# Altium PCB GPSDO.with.gnd.trace.PcbDoc (part 1 of 2)
Units mm, origin at the board's own origin, x right, y up, seen from the top; angles counter-clockwise.
Board outline 100 x 100 mm, 2 copper layers (Top Layer, Bottom Layer); 71 components, 65 nets, 370 pads, 228 vias.
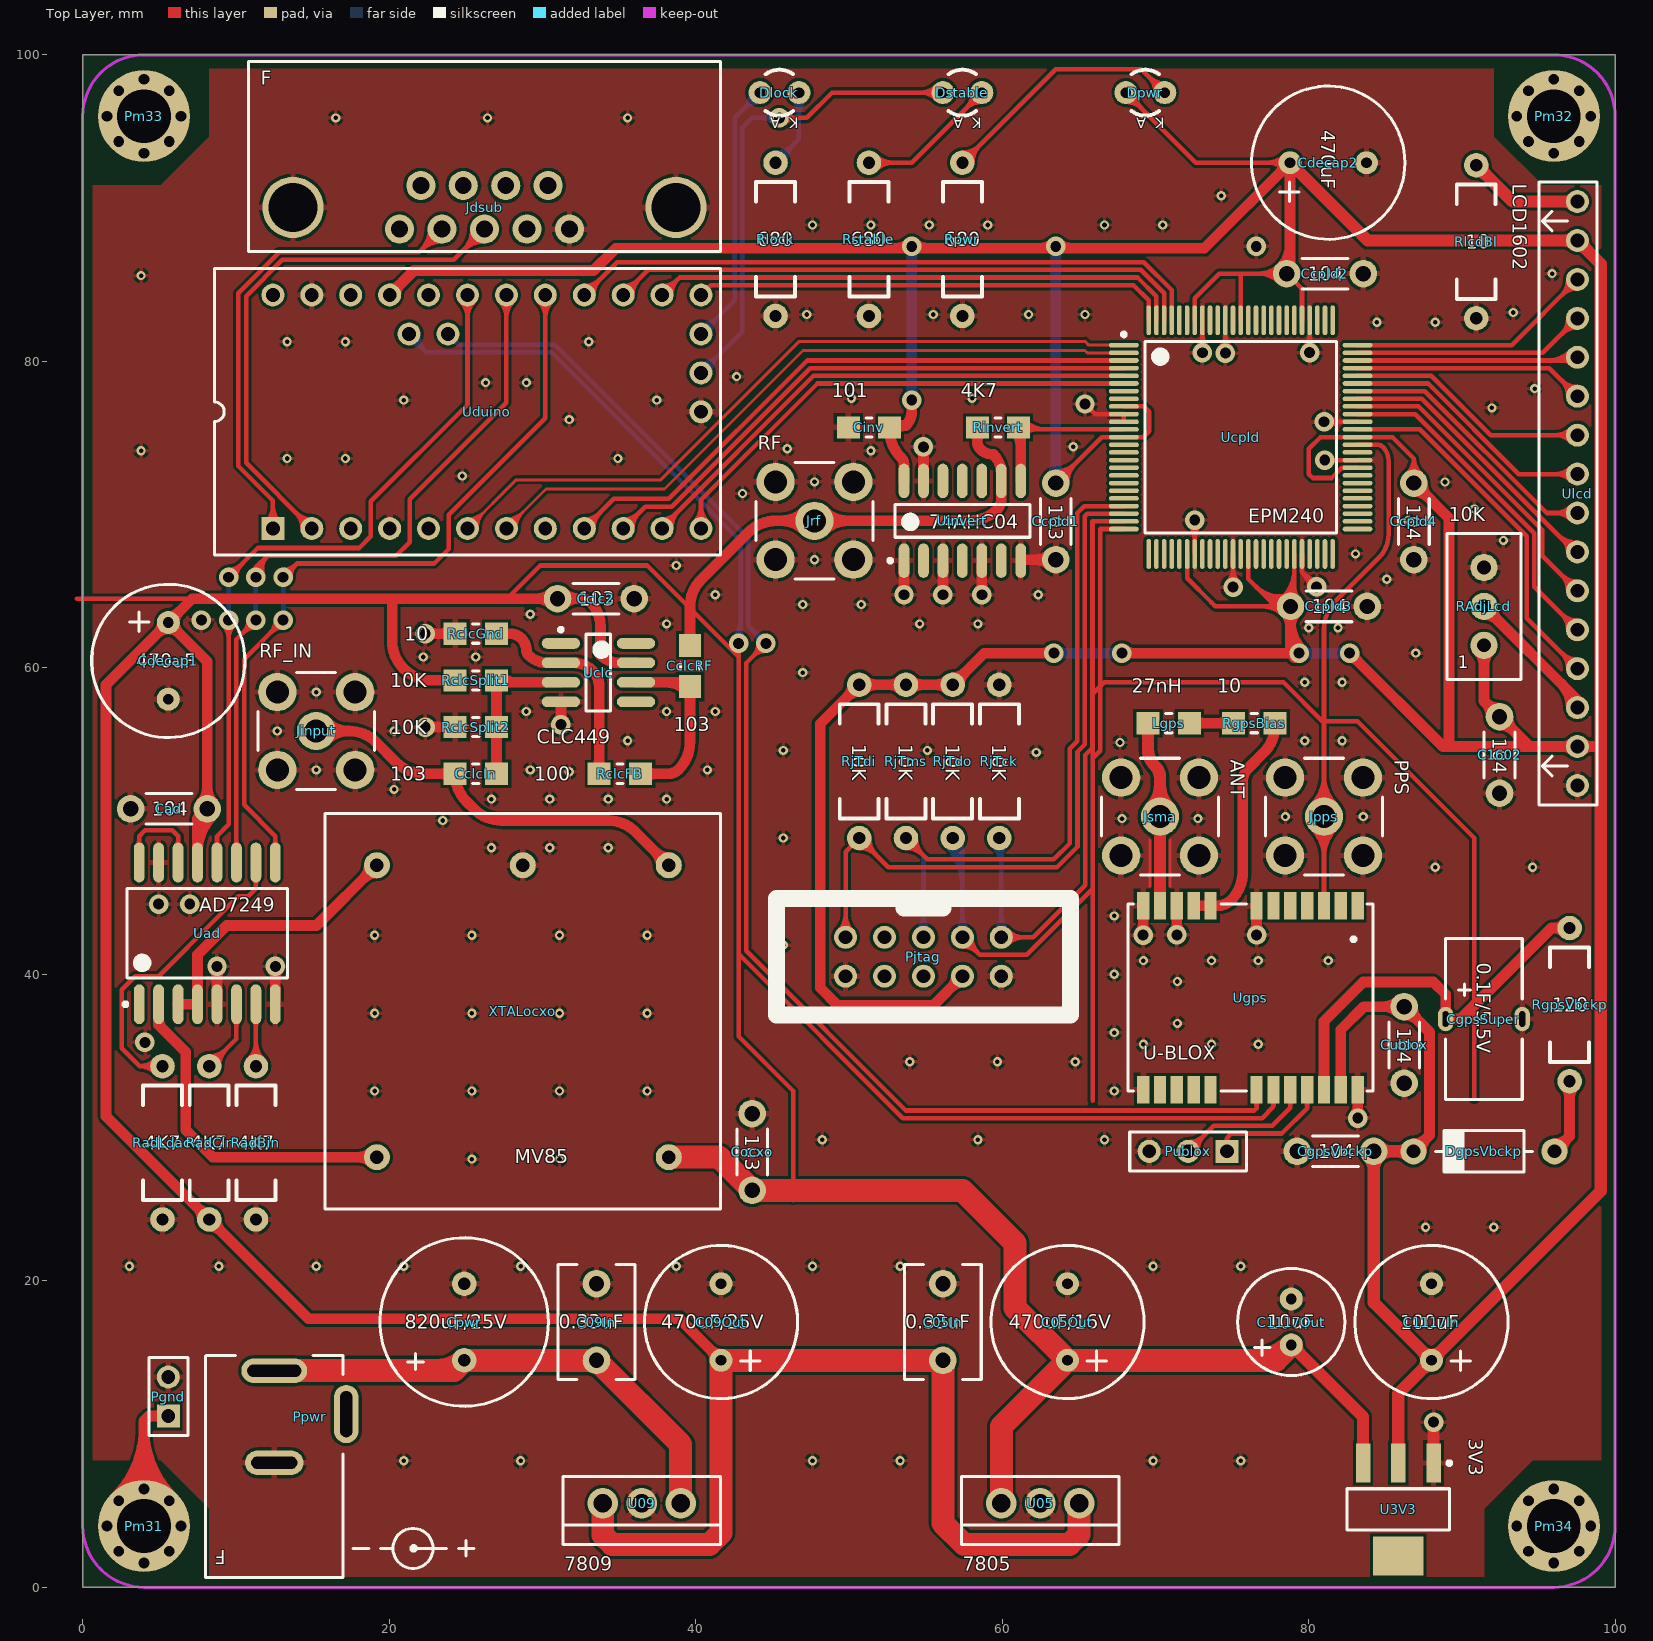
[diagram p0: Top Layer view]
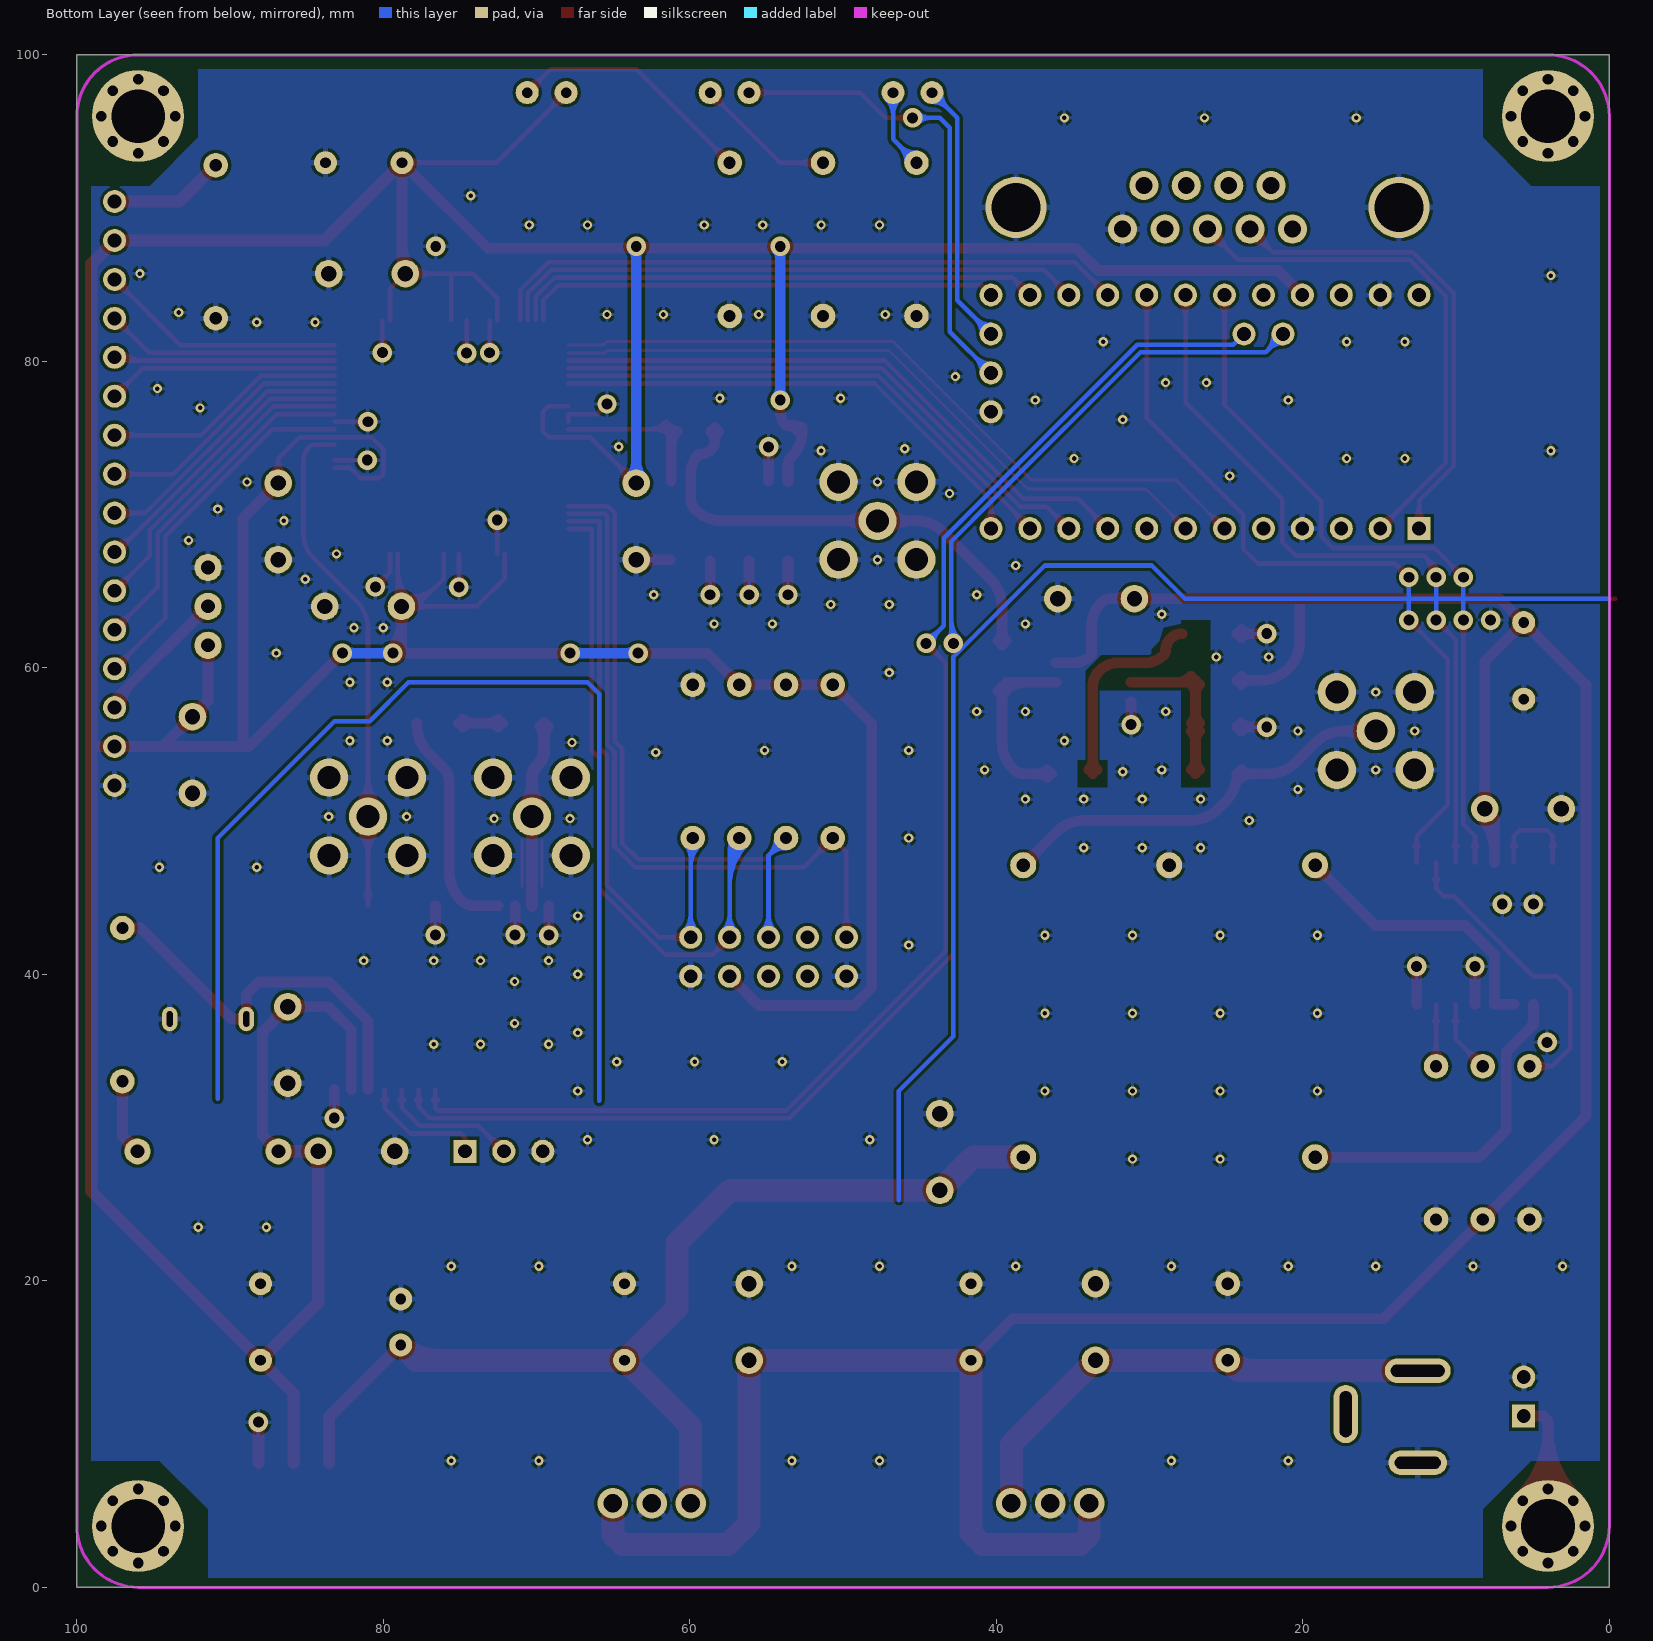
[diagram p1: Bottom Layer view, seen from below]

## Layer stack, top to bottom
Top Layer: signal copper 0.0356
Dielectric: dielectric 0.32, FR-4, Dk 4.8
Bottom Layer: signal copper 0.0356

## Board outline
0,0 100,0 100,100 0,100

## Design rules (kind name [scope] priority, off if disabled: settings)
Clearance [All] p1: gap=0.2
ComponentClearance [All] p1: gap=0.203 collisioncheckmode=3 verticalgap=0.203 showdistances=FALSE
PolygonConnect PolygonConnect_1 [(InComponent('U05') OR InComponent('U09'))] p1: connectstyle=Relief reliefconductorwidth=0.375 reliefentries=4 polygonreliefangle="45 Angle"
PolygonConnect [(InPadClass('All Pads'))] p2: connectstyle=Relief reliefconductorwidth=0.375 reliefentries=4 polygonreliefangle="90 Angle"
RoutingVias [All] p1: holewidth=0.3 width=0.6 viastyle="Through Hole" minholewidth=0.711 minwidth=1.27 maxholewidth=0.711 maxwidth=1.27
SilkscreenOverComponentPads [All] p1: minsilkscreentomaskgap=0.254
SolderMaskExpansion [All] p1: expansion=0.102
Width [All] p1: maxlimit=5 minlimit=0.2 preferedwidth=0.2
26 further rules are at their usual default settings.

## Components (designator, comment, footprint, x,y, rotation, side; value= is the part's Value field where it differs from the comment)
C05In "0.33uF" "ERO MKC1858 0.33uF/63V" 56.134,17.312 r90 top
C05Out "470uF/16V" "SANYO SEP 560uF 10V" 64.262,17.312 r90 top
C09In "0.33uF" "ERO MKC1858 0.33uF/63V" 33.528,17.312 r270 top
C09Out "470uF/25V" "SANYO SEP 560uF 10V" 41.656,17.312 r90 top
C1117In "100uF" "SANYO SEP 560uF 10V" 88.011,17.312 r90 top
C1117Out "10uF" "Nichicon FW 10uF 100V" 78.867,18.812 r270 top
C1602 "104" "BC MKT370 0.1uF/63V" 92.456,51.816 r90 top
Cad "104" "BC MKT370 0.1uF/63V" 8.128,50.8 r180 top
Cclc2 "103" "BC MKT370 0.1uF/63V" 30.988,64.516 r0 top
CclcIn "103" 0805.Cap.L 25.654,53.086 r0 top
CclcRF "103" 0805.Cap.L 39.624,60.12 r90 top
Ccpld1 "103" "BC MKT370 0.1uF/63V" 63.5,67.056 r90 top
Ccpld2 "104" "BC MKT370 0.1uF/63V" 83.566,85.725 r180 top
Ccpld3 "104" "BC MKT370 0.1uF/63V" 83.82,64.008 r180 top
Ccpld4 "104" "BC MKT370 0.1uF/63V" 86.868,67.056 r90 top
Cdecap1 "470uF" "SANYO SEP 560uF 10V" 5.588,60.452 r270 top
Cdecap2 "470uF" "SANYO SEP 560uF 10V" 81.28,92.964 r0 top
CgpsSuper "0.1F/5.5V" "Panasonic SD 0.1F / 5.5V" 91.44,37.084 r0 top
CgpsVbckp "104" "BC MKT370 0.1uF/63V" 79.248,28.448 r0 top
Cinv "101" 0805.Cap.L 51.308,75.692 r0 top
Cocxo "103" "BC MKT370 0.1uF/63V" 43.688,25.908 r90 top
Cpwr "820uF/25V" "NCC LXZ 820uF 25V" 24.892,19.812 r270 top
Cublox "104" "BC MKT370 0.1uF/63V" 86.233,32.893 r90 top
DgpsVbckp "1N4002" 1N4007 91.44,28.448 r0 top
Dlock "LED0" "3mm LED" 44.196,97.536 r180 top
Dpwr "LED0" "3mm LED" 68.072,97.536 r180 top
Dstable "LED0" "3mm LED" 56.134,97.536 r180 top
Jdsub "D-Sub 9" DSUB-9 26.22,99.568 r0 top
Jinput "RF_IN" SMA 15.24,55.88 r0 top
Jpps "PPS" SMA 81.001,50.292 r90 top
Jrf "RF" SMA 47.752,69.596 r0 top
Jsma "ANT" SMA 70.301,50.292 r90 top
Lgps "27nH" 0805.L.L 70.866,56.388 r180 top
Pgnd "Header 2" HDR1X2 5.588,11.176 r90 top
Pjtag "Header 5X2" "DC3 2.54mm 10P" 54.864,41.148 r180 top
Pm31 "M3" "M3 Screw Mount" 4,4 r0 top
Pm32 "M3" "M3 Screw Mount" 96,96 r0 top
Pm33 "M3" "M3 Screw Mount" 4,96 r0 top
Pm34 "M3" "M3 Screw Mount" 96,4 r0 top
Ppwr "DC-005" DC-005 12.5,8.128 r90 top
Publox "Header 3" HDR1X3 74.676,28.448 r180 top
RadBin "4K7" RJ24 11.303,24.003 r90 top
RadClr "4K7" RJ24 8.255,24.003 r90 top
RAdjLcd "10K" 3296W 91.44,64.008 r0 top
RadLdac "4K7" RJ24 5.207,34.003 r270 top
RclcFB "100" 0805.Res.L 35.052,53.086 r0 top
RclcGnd "10" 0805.Res.L 25.654,62.23 r0 top
RclcSplit1 "10K" 0805.Res.L 25.654,59.182 r180 top
RclcSplit2 "10K" 0805.Res.L 25.654,56.134 r0 top
RgpsBias "10" 0805.Res.L 76.454,56.388 r180 top
RgpsVbckp "120" RJ24 97.028,33.02 r90 top
Rinvert "4K7" 0805.Res.L 59.729,75.692 r180 top
RjTck "10K" RJ24 59.817,48.895 r90 top
RjTdi "10K" RJ24 50.673,48.895 r90 top
RjTdo "10K" RJ24 56.769,48.895 r90 top
RjTms "10K" RJ24 53.721,48.895 r90 top
RlcdBl "10" RJ24 90.932,82.804 r90 top
Rlock "680" RJ24 45.212,92.964 r270 top
Rpwr "680" RJ24 57.404,92.964 r270 top
Rstable "680" RJ24 51.308,92.964 r270 top
U3V3 "3V3" "LM1117 SOT-223" 85.852,5.08 r270 top
U05 "7805" MC7805 62.484,4.064 r180 top
U09 "7809" MC7805 36.477,4.064 r180 top
Uad "AD7249" "AD7249 SOIC-16" 8.128,42.672 r90 top
Uclc "CLC449" "CLC449 SOIC-8" 33.655,59.69 r0 top
Ucpld "EPM240" "EPM240/570 TQFP-100" 75.565,75.057 r0 top
Uduino "MiniPro" "DIP24 - Arduino" 12.41,69.088 r90 top
Ugps "U-BLOX" NEO-GPS 84.201,38.481 r90 top
Uinvert "74AHC04" "74AHC04 SOP-14" 57.404,69.596 r90 top
Ulcd "LCD1602" LCD1602 97.536,52.324 r90 top
XTALocxo "MV85" MV85 28.72,37.592 r270 top

## Footprints (in the part's own frame and the unit in brackets; to place one, negate y for a bottom-side part, rotate by r counter-clockwise, add the part's x,y. Pads: shape width x height; smd on the part's side, far side on the other; paste and mask are expansions set on the pad)
1N4007 [mm]
  round 1.7 hole 0.9: 1(-4.6,0) 2(4.6,0)
  silkscreen extent -3.17,-1.36 3.17,1.36
"3mm LED" [mm]
  round 1.5 hole 0.7: 1(0,0) 2(-2.54,0)
  silkscreen extent -2.17,-1.5 -0.37,1.5
"74AHC04 SOP-14" [mm] "SOP, 14-Leads, Body 8.8x4.0mm (max), Pitch 1.27mm, IPC Low Density"
  oval 2.25x0.7 smd: 1(-2.6,3.81) 2(-2.6,2.54) 3(-2.6,1.27) 4(-2.6,0) 5(-2.6,-1.27) 6(-2.6,-2.54) 7(-2.6,-3.81) 8(2.6,-3.81) 9(2.6,-2.54) 10(2.6,-1.27) 11(2.6,0) 12(2.6,1.27) 13(2.6,2.54) 14(2.6,3.81)
  silkscreen extent -2.72,-4.4 1.07,4.83, body extent -2,-4.38 2,4.38, height 1.75
0805.Cap.L [mm]
  rect 1.5x1.45 smd: 1(-1.35,0) 2(1.35,0)
  silkscreen extent -0.2,-0.63 0.2,0.63, body extent -1,-0.6 1,0.6, height 0.5
0805.L.L [mm]
  rect 1.5x1.45 smd: 1(-1.35,0) 2(1.35,0)
  silkscreen extent -0.2,-0.63 0.2,0.63, body extent -1,-0.6 1,0.6, height 0.5
0805.Res.L [mm]
  rect 1.5x1.45 smd: 1(-1.35,0) 2(1.35,0)
  silkscreen extent -0.2,-0.63 0.2,0.63, body extent -1,-0.6 1,0.6, height 0.5
3296W [mil] "3296W Trimming Potentiometer"
  round 70 hole 35: 1(0,-100) 2(0,0) 3(0,100)
  silkscreen extent -95,-188 95,188
"AD7249 SOIC-16" [mm]
  oval 2.6x0.7 smd: 1(-4.625,4.445) 2(-4.625,3.175) 3(-4.625,1.905) 4(-4.625,0.635) 5(-4.625,-0.635) 6(-4.625,-1.905) 7(-4.625,-3.175) 8(-4.625,-4.445) 9(4.625,-4.445) 10(4.625,-3.175) 11(4.625,-1.905) 12(4.625,-0.635) 13(4.625,0.635) 14(4.625,1.905) 15(4.625,3.175) 16(4.625,4.445)
  silkscreen extent -4.75,-5.25 2.93,5.47, body extent -3.8,-5.25 3.8,5.25, height 2.65
"BC MKT370 0.1uF/63V" [mm] "7mm x 2mm, foot dist. 5mm"
  round 1.8 hole 1: 1(0,0) 2(5,0)
  silkscreen extent 1,-1 4,1
"CLC449 SOIC-8" [mm] "SOIC, 8-Leads, Body 5.0x4.0mm (max), Pitch 1.27mm, IPC Low Density"
  oval 2.5x0.7 smd: 1(-2.45,1.905) 2(-2.45,0.635) 3(-2.45,-0.635) 4(-2.45,-1.905) 5(2.45,-1.905) 6(2.45,-0.635) 7(2.45,0.635) 8(2.45,1.905)
  silkscreen extent -2.57,-2.5 0.8,2.93, body extent -1.99,-2.5 1.99,2.5, height 1.75
"DC3 2.54mm 10P" [mm]
  round 1.5 hole 0.9 mask+0: 1(-5.08,-1.27) 2(-5.08,1.27) 3(-2.54,-1.27) 4(-2.54,1.27) 5(0,-1.27) 6(0,1.27) 7(2.54,-1.27) 8(2.54,1.27) 9(5.08,-1.27) 10(5.08,1.27)
  silkscreen extent -9.6,-3.8 9.6,3.8
DC-005 [mm]
  rrect100% 1.6x4.3 hole 0.8 slot 3.5 at 90 deg mask+0: 1(6,0)
  rrect100% 1.6x3.8 hole 0.8 slot 3 at 90 deg mask+0: 2(0,0)
  rrect100% 3.8x1.6 hole 0.8 slot 3 at 0 deg mask+0: 3(3.175,-4.699)
  silkscreen extent -7.5,-4.5 6.98,4.5
"DIP24 - Arduino" [mm]
  rect 1.5x1.5 hole 0.9: 1(0,0)
  round 1.5 hole 0.9: 2(0,-2.54) 3(0,-5.08) 4(0,-7.62) 5(0,-10.16) 6(0,-12.7) 7(0,-15.24) 8(0,-17.78) 9(0,-20.32) 10(0,-22.86) 11(0,-25.4) 12(0,-27.94) 13(15.24,-27.94) 14(15.24,-25.4) 15(15.24,-22.86) 16(15.24,-20.32) 17(15.24,-17.78) 18(15.24,-15.24) 19(15.24,-12.7) 20(15.24,-10.16) 21(15.24,-7.62) 22(15.24,-5.08) 23(15.24,-2.54) 24(15.24,0) 25(7.62,-27.94) 26(10.16,-27.94) 27(12.7,-27.94) 28(12.7,-11.43) 29(12.7,-8.89)
  silkscreen extent -1.74,-29.21 16.98,3.81
DSUB-9 [mm]
  round 1.9 hole 1.1 mask+0: 1(-5.54,-10.94) 2(-2.77,-10.94) 3(0,-10.94) 4(2.77,-10.94) 5(5.54,-10.94) 6(-4.155,-8.1) 7(-1.385,-8.1) 8(1.385,-8.1) 9(4.155,-8.1)
  round 4 hole 3.2 mask+0: 10(-12.5,-9.52) 11(12.5,-9.52)
  silkscreen extent -15.4,-12.4 15.4,0
"EPM240/570 TQFP-100" [mm] "TSQFP, 100-Leads, Body 16.0x16.0mm (max), Pitch 0.50mm, IPC Low Density"
  oval 1.95x0.3 smd: 1(-7.625,6) 2(-7.625,5.5) 3(-7.625,5) 4(-7.625,4.5) 5(-7.625,4) 6(-7.625,3.5) 7(-7.625,3) 8(-7.625,2.5) 9(-7.625,2) 10(-7.625,1.5) 11(-7.625,1) 12(-7.625,0.5) 13(-7.625,0) 14(-7.625,-0.5) 15(-7.625,-1) 16(-7.625,-1.5) 17(-7.625,-2) 18(-7.625,-2.5) 19(-7.625,-3) 20(-7.625,-3.5) 21(-7.625,-4) 22(-7.625,-4.5) 23(-7.625,-5) 24(-7.625,-5.5) 25(-7.625,-6) 51(7.625,-6) 52(7.625,-5.5) 53(7.625,-5) 54(7.625,-4.5) 55(7.625,-4) 56(7.625,-3.5) 57(7.625,-3) 58(7.625,-2.5) 59(7.625,-2) 60(7.625,-1.5) 61(7.625,-1) 62(7.625,-0.5) 63(7.625,0) 64(7.625,0.5) 65(7.625,1) 66(7.625,1.5) 67(7.625,2) 68(7.625,2.5) 69(7.625,3) 70(7.625,3.5) 71(7.625,4) 72(7.625,4.5) 73(7.625,5) 74(7.625,5.5) 75(7.625,6)
  oval 0.3x1.95 smd: 26(-6,-7.625) 27(-5.5,-7.625) 28(-5,-7.625) 29(-4.5,-7.625) 30(-4,-7.625) 31(-3.5,-7.625) 32(-3,-7.625) 33(-2.5,-7.625) 34(-2,-7.625) 35(-1.5,-7.625) 36(-1,-7.625) 37(-0.5,-7.625) 38(0,-7.625) 39(0.5,-7.625) 40(1,-7.625) 41(1.5,-7.625) 42(2,-7.625) 43(2.5,-7.625) 44(3,-7.625) 45(3.5,-7.625) 46(4,-7.625) 47(4.5,-7.625) 48(5,-7.625) 49(5.5,-7.625) 50(6,-7.625) 76(6,7.625) 77(5.5,7.625) 78(5,7.625) 79(4.5,7.625) 80(4,7.625) 81(3.5,7.625) 82(3,7.625) 83(2.5,7.625) 84(2,7.625) 85(1.5,7.625) 86(1,7.625) 87(0.5,7.625) 88(0,7.625) 89(-0.5,7.625) 90(-1,7.625) 91(-1.5,7.625) 92(-2,7.625) 93(-2.5,7.625) 94(-3,7.625) 95(-3.5,7.625) 96(-4,7.625) 97(-4.5,7.625) 98(-5,7.625) 99(-5.5,7.625) 100(-6,7.625)
  silkscreen extent -7.75,-6.25 6.25,6.82, body extent -7,-7 7,7, height 1.2
"ERO MKC1858 0.33uF/63V" [mm] "7.5mm x 5mm, foot dist. 5mm"
  round 1.8 hole 1: 1(-2.5,0) 2(2.5,0)
  silkscreen extent -3.75,-2.5 3.75,2.5
HDR1X2 [mm] "Connector; Header; 2 Position"
  rect 1.5x1.5 hole 0.9: 1(0,0)
  round 1.5 hole 0.9: 2(2.54,0)
  silkscreen extent -1.27,-1.27 3.81,1.27
HDR1X3 [mm] "Connector; Header; 3 Position"
  rect 1.5x1.5 hole 0.9: 1(0,0)
  round 1.5 hole 0.9: 2(2.54,0) 3(5.08,0)
  silkscreen extent -1.27,-1.27 6.35,1.27
LCD1602 [mm] "SIP"
  round 1.5 hole 0.9 mask+0: 1(0,0) 2(2.54,0) 3(5.08,0) 4(7.62,0) 5(10.16,0) 6(12.7,0) 7(15.24,0) 8(17.78,0) 9(20.32,0) 10(22.86,0) 11(25.4,0) 12(27.94,0) 13(30.48,0) 14(33.02,0) 15(35.56,0) 16(38.1,0)
  silkscreen extent -1.27,-1.27 39.37,2.5
"LM1117 SOT-223" [mm] "SOT223, 4-Leads, Body 6.7x7.3mm (max), Pitch 2.30mm, IPC Low Density"
  rect 2.55x0.95 smd: 1(-3.025,2.3) 2(-3.025,0) 3(-3.025,-2.3)
  rect 2.55x3.3 smd: 4(3.025,0)
  silkscreen extent -3.15,-3.35 1.35,3.45, body extent -1.85,-3.35 1.85,3.35, height 1.8
"M3 Screw Mount" [mm] "M3 Screw Mount, Hole D. 3.5mm"
  round 6 hole 3.5: 1(0,0)
MC7805 [mm] "TO?220, SINGLE GAUGE"
  round 2 hole 1.2: 1(-2.54,-1.416) 2(0,-1.416) 3(2.54,-1.416)
  silkscreen extent -5.14,-3.18 5.14,1.27
MV85 [mm]
  round 1.7 hole 0.9: 1(-9.525,9.525) 2(-9.525,0) 3(-9.525,-9.525) 4(9.525,9.525) 5(9.525,-9.525)
  silkscreen extent -12.9,-12.9 12.9,12.9
"NCC LXZ 820uF 25V" [mm] "10*24, foot dist. 5mm"
  round 1.6 hole 0.8: 1(5,0) 2(0,0)
  silkscreen extent -3,-5.5 8,5.5
NEO-GPS [mm]
  rect 1.8x0.8 smd mask+0: 1(6,1) 2(6,2.1) 3(6,3.2) 4(6,4.3) 5(6,5.4) 6(6,6.5) 7(6,7.6) 8(6,10.6) 9(6,11.7) 10(6,12.8) 11(6,13.9) 12(6,15) 13(-6,15) 14(-6,13.9) 15(-6,12.8) 16(-6,11.7) 17(-6,10.6) 18(-6,7.6) 19(-6,6.5) 20(-6,5.4) 21(-6,4.3) 22(-6,3.2) 23(-6,2.1) 24(-6,1)
  silkscreen extent -6.1,0 6.1,16
"Nichicon FW 10uF 100V" [mm] "6.5mm*12mm, foot dist. 3mm"
  round 1.5 hole 0.7: 1(3,0) 2(0,0)
  silkscreen extent -2,-3.5 5,3.5
"Panasonic SD 0.1F / 5.5V" [mm]
  rrect100% 1x1.6 hole 0.4 slot 1 at 90 deg mask+0: 1(-2.5,0) 2(2.5,0)
  silkscreen extent -2.5,-5.25 2.5,5.25
RJ24 [mm] "Beijing 718 RJ24, 1/4W"
  round 1.6 hole 0.8: 1(0,0) 2(10,0)
  silkscreen extent 1.27,-1.27 8.73,1.27
"SANYO SEP 560uF 10V" [mm] "D: 10mm, Lmax: 13mm, Fdist: 5mm, Fd: 0.6mm"
  round 1.5 hole 0.7: 1(-2.5,0) 2(2.5,0)
  silkscreen extent -5,-5 5,5
SMA [mm]
  round 2.5 hole 1.5: 1(-2.54,2.54) 2(-2.54,-2.54) 3(2.54,-2.54) 4(2.54,2.54) 5(0,0)
  silkscreen extent -3.81,-3.81 3.81,3.81

## Part data
C05In C09In C1602 Cad Cclc2 CclcIn CclcRF Ccpld1 Ccpld2 Ccpld3 Ccpld4 CgpsVbckp Cinv Cocxo Cublox: library part Cap, "Capacitor"
C05Out C09Out C1117In C1117Out Cdecap1 Cdecap2 CgpsSuper Cpwr: library part "Cap Pol1", "Polarized Capacitor (Radial)"
DgpsVbckp: library part "Diode 1N4001", "1 Amp General Purpose Rectifier"
Dlock Dpwr Dstable: "Typical INFRARED GaAs LED"
Jinput Jpps Jrf Jsma: library part SMA
Lgps: library part Inductor, "Inductor"
Pgnd: "Header, 2-Pin"
Pjtag: "Header, 5-Pin, Dual row"
Pm31 Pm32 Pm33 Pm34: library part "M3 Screw Mount", "M3 screw mount, hole d: 3.5mm"
Publox: "Header, 3-Pin"
RadBin RadClr RadLdac RclcFB RclcGnd RclcSplit1 RclcSplit2 RgpsBias RgpsVbckp Rinvert RjTck RjTdi RjTdo RjTms RlcdBl Rlock Rpwr Rstable: library part Res1, "Resistor"
RAdjLcd: library part "Trimming Potentiometer", "3296 - 3/8\" Square Trimming Potentiometer"
U3V3: library part LM1117, "LM1117-N/LM1117I 800mA Low-Dropout Linear Regulator"
U05 U09: library part MC7805, "1.0 A Positive Voltage  Regulators"
Uad: "LC2MOS Dual 12-Bit Serial DACPORT"
Uclc: "1.1GHz Ultra Wideband Monolithic Op Amp"
Ucpld: "Altera Max II CPLD"
Uduino: library part ArduinoMiniPro, "Microcontroller board based on the ATmega328P"
Ugps: library part NEO-GPS, "u-blox 6 GPS Modules"
Uinvert: "hex inverter"
XTALocxo: library part OCXO, "OCXO"

## Via types
v1: diameter 0.6, hole 0.3, Top Layer to Bottom Layer, 152 vias
v2: diameter 1.27, hole 0.711, Top Layer to Bottom Layer, 44 vias
v3: diameter 1, hole 0.7, Top Layer to Bottom Layer, 32 vias

## Nets (pads, with @x,y where several pads share a name; then routed paths per layer and width w, separated by ;. In a path a pad name is that pad's centre, name@x,y a point inside that pad or via, vN(x,y) a via of type N, cw(c..) or ccw(c..) an arc to the next point about the centre after c; other vN are vias at no path point)
AMPRF: CclcRF.2 Jrf.5 Rinvert.2 Uinvert.9 | length 41.4
  Top Layer w0.7: CclcRF.2@39.359,61.76 ccw(c38.719,62.4) 39.624,62.4 ccw(c40.529,62.4) CclcRF.2@39.889,61.76 ; CclcRF.2@39.624,61.47 39.624,63.972 cw(c42.164,63.972) 40.368,65.768 43.452,68.852 cw(c45.248,67.056) 45.248,69.596 Jrf.5@47.752,69.596 57.876,69.596 ccw(c57.876,72.136) 59.672,70.34 ccw(c59.015,70.997) 59.944,70.997 Uinvert.9@59.944,72.196 59.944,72.688 ccw(c58.21,72.688) 59.436,73.914 cw(c59.436,75.14) 58.569,74.273 cw(c59.027,74.731) 58.379,74.731 Rinvert.2@58.379,75.692 ; Jrf.5@47.116,68.96 ccw(c45.579,67.423) 45.579,69.596 ccw(c45.579,71.769) Jrf.5@47.116,70.232 ; Jrf.5@48.388,68.96 cw(c49.925,67.423) 49.925,69.596 cw(c49.925,71.769) Jrf.5@48.388,70.232 ; Rinvert.2@58.114,75.427 cw(c57.474,74.787) 58.379,74.787 cw(c59.284,74.787) Rinvert.2@58.644,75.427
CLK: Rinvert.1 Ucpld.12 Uinvert.8 | length 14.2
  Top Layer w0.3: Rinvert.1@61.214,75.557 Ucpld.12@67.94,75.557 ; Rinvert.1@61.298,75.886 ccw(c62.094,76.682) 62.094,75.557 ; Rinvert.1@61.511,75.285 cw(c62.166,74.63) 62.166,75.557 ; Rinvert.1@61.511,76.099 ccw(c62.818,77.406) 62.818,75.557
  Top Layer w0.7: Rinvert.1@60.839,75.427 cw(c59.933,74.521) 61.214,74.521 ; Uinvert.8@61.214,72.196 Rinvert.1@61.214,75.557
D0: Ucpld.68 Ulcd.7 | length 21.6
  Top Layer w0.3: Ucpld.68@83.19,77.557 87.378,77.557 97.371,67.564 Ulcd.7@97.536,67.564 ; 96.231,68.705 ccw(c97.536,70.01) Ulcd.7@97.536,68.164 ; 96.628,68.307 cw(c95.885,67.564) Ulcd.7@96.936,67.564 ; 96.743,68.193 ccw(c97.536,68.986) Ulcd.7@97.536,67.864
D1: Ucpld.69 Ulcd.8 | length 19.9
  Top Layer w0.3: Ucpld.69@83.19,78.057 87.585,78.057 95.538,70.104 Ulcd.8@97.536,70.104 ; Ulcd.8@97.112,69.68 ccw(c96.087,68.655) 96.087,70.104 ccw(c96.087,71.553) Ulcd.8@97.112,70.528
D2: Ucpld.70 Ulcd.9 | length 19.1
  Top Layer w0.3: Ucpld.70@83.19,78.557 87.793,78.557 93.706,72.644 Ulcd.9@97.536,72.644 ; Ulcd.9@97.112,72.22 ccw(c96.087,71.195) 96.087,72.644 ccw(c96.087,74.093) Ulcd.9@97.112,73.068
D3: Ucpld.71 Ulcd.10 | length 18.2
  Top Layer w0.3: Ucpld.71@83.19,79.057 88,79.057 91.873,75.184 Ulcd.10@97.536,75.184 ; Ulcd.10@97.112,74.76 ccw(c96.087,73.735) 96.087,75.184 ccw(c96.087,76.633) Ulcd.10@97.112,75.608
D4: Ucpld.72 Ulcd.11 | length 17.4
  Top Layer w0.3: Ucpld.72@83.19,79.557 95.703,79.557 Ulcd.11@97.536,77.724 ; Ulcd.11@96.936,77.724 ccw(c95.487,77.724) 96.512,78.748 ccw(c97.536,79.773) Ulcd.11@97.536,78.324
D5: Ucpld.73 Ulcd.12 | length 17.8
  Top Layer w0.3: Ucpld.73@83.19,80.057 97.329,80.057 Ulcd.12@97.536,80.264 ; 95.588,80.057 ccw(c95.588,82.212) Ulcd.12@97.112,80.688 ; 96.312,80.057 ccw(c96.312,81.488) Ulcd.12@97.324,80.476 ; 96.587,80.057 cw(c96.587,79.315) Ulcd.12@97.112,79.84
D6: Ucpld.74 Ulcd.13 | length 17.6
  Top Layer w0.3: Ucpld.74@83.19,80.557 95.289,80.557 Ulcd.13@97.536,82.804 ; Ulcd.13@96.936,82.804 cw(c95.487,82.804) 96.512,81.78 cw(c97.536,80.755) Ulcd.13@97.536,82.204
D7: Ucpld.75 Ulcd.14 | length 18.4
  Top Layer w0.3: Ucpld.75@83.19,81.057 93.249,81.057 Ulcd.14@97.536,85.344 ; Ulcd.14@96.936,85.344 cw(c95.487,85.344) 96.512,84.32 cw(c97.536,83.295) Ulcd.14@97.536,84.744
E: Ucpld.67 Ulcd.6 | length 22.6
  Top Layer w0.3: Ucpld.67@83.19,77.057 87.171,77.057 95.234,68.994 95.234,67.326 Ulcd.6@97.536,65.024 ; Ulcd.6@96.936,65.024 ccw(c95.487,65.024) 96.512,66.048 ccw(c97.536,67.073) Ulcd.6@97.536,65.624
GND: C05In.2 C05Out.2 C09In.1 C09Out.2 C1117In.2 C1117Out.2 C1602.1 Cad.2 Cclc2.2 Ccpld1.1 Ccpld2.1 Ccpld3.1 Ccpld4.1 Cdecap1.2 Cdecap2.2 CgpsSuper.2 CgpsVbckp.1 Cinv.1 Cocxo.2 Cpwr.2 Cublox.1 Jdsub.5 Jdsub.10 Jdsub.11 Jinput.1 Jinput.2 Jinput.3 Jinput.4 Jpps.1 Jpps.2 Jpps.3 Jpps.4 Jrf.1 Jrf.2 Jrf.3 Jrf.4 Jsma.1 Jsma.2 Jsma.3 Jsma.4 Pgnd.2 Pjtag.2 Pjtag.10 Ppwr.2 Publox.3 RadBin.1 RAdjLcd.3 RadLdac.2 RclcGnd.1 RclcSplit2.1 RjTck.2 RlcdBl.1 Rlock.2 Rpwr.2 Rstable.2 U3V3.1 U05.2 U09.2 Uad.5 Uad.8 Uad.15 Uclc.4 Ucpld.10 Ucpld.11 Ucpld.32 Ucpld.37 Ucpld.46 Ucpld.60 Ucpld.65 Ucpld.79 Ucpld.90 Ucpld.93 Uduino.4 Uduino.23 Uduino.25 Ugps.7 Ugps.10 Ugps.12 Ugps.13 Ugps.24 Uinvert.1 Uinvert.3 Uinvert.5 Uinvert.7 Uinvert.13 Ulcd.1 XTALocxo.2 | length 90.6
  Top Layer w0.2: 69.643,45.72 69.643,48.768 ; 70.959,45.72 70.959,48.768
  Top Layer w0.3: v2(65.405,77.216) 66.064,76.557 Ucpld.10@67.94,76.557 Ucpld.11@67.94,76.057 ; v2@72.222,69.301 cw(c71.394,68.473) 72.565,68.473 cw(c73.736,68.473) v2@72.908,69.301 ; Ucpld.32@72.565,67.432 v2(72.565,69.644) ; v2@72.722,80.901 ccw(c71.894,81.729) 73.065,81.729 ccw(c74.236,81.729) v2@73.408,80.901 ; v2(73.065,80.558) Ucpld.93@73.065,82.682 ; v2@74.222,80.877 ccw(c73.394,81.705) 74.565,81.705 ccw(c75.736,81.705) v2@74.908,80.877 ; v2(74.565,80.534) Ucpld.90@74.565,82.682 ; v2@74.722,65.613 ccw(c73.894,66.441) 75.065,66.441 ccw(c76.236,66.441) v2@75.408,65.613 ; v2(75.065,65.27) Ucpld.37@75.065,67.432 ; Ucpld.46@79.565,67.432 79.565,66.231 v2(80.518,65.278) ; v2@79.722,80.916 ccw(c78.894,81.744) 80.065,81.744 ccw(c81.236,81.744) v2@80.408,80.916 ; v2@80.033,65.278 ccw(c78.862,65.278) 79.69,66.106 ccw(c80.518,66.934) v2@80.518,65.763 ; v2(80.065,80.573) Ucpld.79@80.065,82.682 ; v2(81.01,76.057) Ucpld.65@83.19,76.057 ; v2(81.05,73.557) Ucpld.60@83.19,73.557 ; v2@81.353,75.714 cw(c82.181,74.886) 82.181,76.057 cw(c82.181,77.228) v2@81.353,76.4
  Top Layer w0.7: v2@8.561,40.311 cw(c8.075,39.825) 8.763,39.825 cw(c9.451,39.825) v2@8.965,40.311 ; Uad.5@8.763,38.047 v2(8.763,40.513) ; v2@12.371,40.311 cw(c11.885,39.825) 12.573,39.825 cw(c13.261,39.825) v2@12.775,40.311 ; Uad.8@12.573,38.047 v2(12.573,40.513) ; v2(22.352,56.134) RclcSplit2.1@24.304,56.134 ; v2(22.352,62.23) RclcGnd.1@24.304,62.23 ; v2@22.554,55.932 cw(c23.04,55.446) 23.04,56.134 cw(c23.04,56.822) v2@22.554,56.336 ; v2@22.554,62.028 cw(c23.04,61.542) 23.04,62.23 cw(c23.04,62.918) v2@22.554,62.432 ; RclcSplit2.1@24.014,55.869 ccw(c23.374,55.229) 23.374,56.134 ccw(c23.374,57.039) RclcSplit2.1@24.014,56.399 ; RclcGnd.1@24.014,61.965 ccw(c23.374,61.325) 23.374,62.23 ccw(c23.374,63.135) RclcGnd.1@24.014,62.495 ; v2@31.003,56.5 ccw(c30.517,56.986) 31.205,56.986 ccw(c31.893,56.986) v2@31.407,56.5 ; v2(31.205,56.298) Uclc.4@31.205,57.785 ; v2@53.392,64.972 ccw(c52.906,65.458) 53.594,65.458 ccw(c54.282,65.458) v2@53.796,64.972 ; v2(53.594,64.77) Uinvert.1@53.594,66.996 ; v2@54.662,74.22 cw(c54.176,73.734) 54.864,73.734 cw(c55.552,73.734) v2@55.066,74.22 ; Uinvert.13@54.864,72.196 v2(54.864,74.422) ; v2@55.932,64.972 ccw(c55.446,65.458) 56.134,65.458 ccw(c56.822,65.458) v2@56.336,64.972 ; v2(56.134,64.77) Uinvert.3@56.134,66.996 ; v2@58.472,64.972 ccw(c57.986,65.458) 58.674,65.458 ccw(c59.362,65.458) v2@58.876,64.972 ; v2(58.674,64.77) Uinvert.5@58.674,66.996 ; Uinvert.7@61.274,67.056 Ccpld1.1@63.5,67.056 ; Ccpld1.1@63.111,66.667 ccw(c62.172,65.728) 62.172,67.056 ccw(c62.172,68.384) Ccpld1.1@63.111,67.445 ; v2@68.999,42.761 ccw(c68.513,43.247) 69.201,43.247 ccw(c69.889,43.247) v2@69.403,42.761 ; v2(69.201,42.559) Ugps.12@69.201,44.481 ; v2@71.199,42.774 ccw(c70.713,43.26) 71.401,43.26 ccw(c72.089,43.26) v2@71.603,42.774 ; v2(71.401,42.572) Ugps.10@71.401,44.481 ; v2@76.399,42.767 ccw(c75.913,43.253) 76.601,43.253 ccw(c77.289,43.253) v2@76.803,42.767 ; v2(76.601,42.565) Ugps.7@76.601,44.481 ; v2@82.999,30.825 ccw(c82.513,31.311) 83.201,31.311 ccw(c83.889,31.311) v2@83.403,30.825 ; v2(83.201,30.623) Ugps.24@83.201,32.481
  Top Layer w0.8: U3V3.1@88.152,8.105 v2(88.152,10.781)
  other v1: 20.955,8.255 28.575,8.255 47.625,8.255 53.34,8.255 69.85,8.255 75.565,8.255 3.048,20.955 8.89,20.955 15.24,20.955 20.955,20.955 28.575,20.955 38.735,20.955 47.625,20.955 53.34,20.955 69.85,20.955 75.565,20.955 87.63,23.495 92.075,23.495 25.4,27.94 31.115,27.94 48.26,29.21 58.42,29.21 66.675,29.21 19.05,32.385 25.4,32.385 31.115,32.385 36.83,32.385 67.31,32.385 53.975,34.29 59.69,34.29 64.77,34.29 69.215,35.433 73.66,35.433 76.708,35.433 67.31,36.195 71.438,36.798 19.05,37.465 25.4,37.465 31.115,37.465 36.83,37.465 71.438,39.529 67.31,40.005 69.215,40.894 73.66,40.894 76.708,40.894 81.28,40.894 45.72,41.91 19.05,42.545 25.4,42.545 31.115,42.545 36.83,42.545 67.31,43.815 88.265,46.99 94.615,46.99 26.67,48.26 30.48,48.26 34.29,48.26 45.72,48.895 23.495,50.038 67.818,50.165 72.771,50.165 78.486,50.292 83.566,50.292 26.67,51.435 30.48,51.435 34.29,51.435 38.1,51.435 20.32,52.07 31.75,53.213 15.24,53.34 29.21,53.34 40.767,53.34 62.23,54.483 45.72,54.61 55.118,54.61 67.691,55.129 35.56,55.245 79.745,55.245 82.18,55.245 12.7,55.88 20.32,55.88 28.945,57.15 38.1,57.15 41.275,57.15 15.24,58.42 79.745,59.055 82.18,59.055 46.99,59.69 22.225,60.706 25.654,60.706 86.995,60.96 80.01,62.611 81.915,62.611 38.1,62.865 54.61,62.865 58.42,62.865 29.21,63.5 46.99,64.135 50.8,64.135 41.275,64.77 62.357,64.77 85.09,65.775 38.735,66.675 47.752,67.056 83.058,67.437 92.71,68.315 86.487,69.596 90.805,70.358 43.053,71.374 47.752,72.136 88.9,72.125 24.765,72.517 13.335,73.66 17.145,73.66 34.925,73.66 3.81,74.168 51.435,74.168 45.974,74.295 64.643,74.422 31.75,76.2 91.959,76.962 20.955,77.47 37.465,77.47 50.165,77.597 58.039,77.597 94.742,78.221 26.289,78.613 28.956,78.613 42.672,79.005 13.335,81.28 17.145,81.28 33.02,81.28 84.455,82.55 88.265,82.55 47.244,83.058 55.499,83.058 61.722,83.058 65.405,83.058 93.345,83.185 3.81,85.598 3.81,85.598 95.885,85.725 47.625,88.9 51.435,88.9 55.245,88.9 59.055,88.9 66.675,88.9 70.485,88.9 74.295,90.805 16.51,95.885 26.416,95.885 35.56,95.885
  other v2: 4.064,35.56 4.953,44.577 6.985,44.577 7.747,63.119 76.581,87.503
LOCK: Dlock.1 Uduino.27 | length 21.9
  Bottom Layer w0.3: Uduino.27@40.35,81.788 42.545,83.983 42.545,95.885 Dlock.1@44.196,97.536 ; Uduino.27@40.35,82.388 ccw(c40.35,83.837) 41.374,82.812 ccw(c42.399,81.788) Uduino.27@40.95,81.788 ; Dlock.1@43.596,97.536 cw(c42.147,97.536) 43.172,96.512 cw(c44.196,95.487) Dlock.1@44.196,96.936
NetC09In_2: C09In.2 Cpwr.1 Ppwr.1 U09.1 | length 34.8
  Top Layer w1.5: Ppwr.1@12.5,14.128 12.525,14.153 24.233,14.153 Cpwr.1@24.892,14.812 C09In.2@33.528,14.812 39.017,9.323 U09.1@39.017,5.48 ; 23.18,14.153 ccw(c23.18,16.524) Cpwr.1@24.857,14.847
NetCclcIn_2: CclcIn.2 RclcSplit1.1 RclcSplit2.2 Uclc.3 | length 16.9
  Top Layer w0.7: CclcIn.2@26.739,53.351 ccw(c26.099,53.991) 27.004,53.991 ccw(c27.909,53.991) CclcIn.2@27.269,53.351 ; RclcSplit2.2@26.739,55.869 cw(c26.099,55.229) 27.004,55.229 cw(c27.909,55.229) RclcSplit2.2@27.269,55.869 ; RclcSplit2.2@26.739,56.399 ccw(c26.099,57.039) 27.004,57.039 ccw(c27.909,57.039) RclcSplit2.2@27.269,56.399 ; RclcSplit1.1@26.739,58.917 cw(c26.099,58.277) 27.004,58.277 cw(c27.909,58.277) RclcSplit1.1@27.269,58.917 ; CclcIn.2@27.004,53.086 RclcSplit1.1@27.004,59.182 ; RclcSplit1.1@27.131,59.055 Uclc.3@31.205,59.055 ; RclcSplit1.1@27.294,59.447 ccw(c28.241,60.394) 28.241,59.055
NetCclcRF_1: CclcRF.1 RclcFB.2 Uclc.6 | length 15.6
  Top Layer w0.7: Uclc.6@36.105,59.055 CclcRF.1@39.339,59.055 ; RclcFB.2@36.402,53.086 38.223,53.086 ccw(c38.223,54.015) 38.88,53.358 ccw(c37.084,55.154) 39.624,55.154 CclcRF.1@39.624,58.77 ; RclcFB.2@36.692,52.821 cw(c37.332,52.181) 37.332,53.086 cw(c37.332,53.991) RclcFB.2@36.692,53.351 ; 38.091,59.055 cw(c38.091,57.262) CclcRF.1@39.359,58.53 ; CclcRF.1@39.359,58.48 cw(c38.719,57.84) 39.624,57.84 cw(c40.529,57.84) CclcRF.1@39.889,58.48
NetCgpsSuper_1: CgpsSuper.1 RgpsVbckp.2 Ugps.22 | length 27.6
  Top Layer w0.7: Ugps.22@81.001,32.481 81.001,36.932 83.566,39.497 88.138,39.497 88.94,38.695 CgpsSuper.1@88.94,37.084 89.916,37.084 95.852,43.02 RgpsVbckp.2@97.028,43.02 ; RgpsVbckp.2@96.71,42.702 ccw(c95.942,41.934) 95.942,43.02 ccw(c95.942,44.106) RgpsVbckp.2@96.71,43.338
NetDgpsVbckp_2: DgpsVbckp.2 RgpsVbckp.1 | length 8.6
  Top Layer w0.7: DgpsVbckp.2@96.04,28.448 97.028,29.436 RgpsVbckp.1@97.028,33.02 ; DgpsVbckp.2@96.04,28.948 ccw(c96.04,30.155) 96.894,29.302 ccw(c97.747,28.448) DgpsVbckp.2@96.54,28.448 ; RgpsVbckp.1@96.71,32.702 cw(c95.942,31.934) 97.028,31.934 cw(c98.114,31.934) RgpsVbckp.1@97.346,32.702
NetDlock_2: Dlock.2 Rlock.1 | length 11.3
  Bottom Layer w0.3: Rlock.1@45.212,92.964 46.736,94.488 Dlock.2@46.736,97.536 ; Rlock.1@45.212,93.314 ccw(c45.212,94.159) 45.809,93.561 ccw(c46.407,92.964) Rlock.1@45.562,92.964 ; Rlock.1@45.212,93.614 ccw(c45.212,95.183) 46.322,94.074 ccw(c47.431,92.964) Rlock.1@45.862,92.964 ; Dlock.2@46.312,97.112 cw(c45.287,96.087) 46.736,96.087 cw(c48.185,96.087) Dlock.2@47.16,97.112
NetDpwr_2: Dpwr.2 Rpwr.1 | length 22.4
  Top Layer w0.3: Rpwr.1@57.404,92.964 63.5,99.06 69.088,99.06 Dpwr.2@70.612,97.536 ; Rpwr.1@57.404,93.314 ccw(c57.404,94.159) 58.001,93.561 ccw(c58.599,92.964) Rpwr.1@57.754,92.964 ; Rpwr.1@57.404,93.614 ccw(c57.404,95.183) 58.514,94.074 ccw(c59.623,92.964) Rpwr.1@58.054,92.964 ; Dpwr.2@70.012,97.536 ccw(c68.563,97.536) 69.588,98.56 ccw(c70.612,99.585) Dpwr.2@70.612,98.136
NetDstable_2: Dstable.2 Rstable.1 | length 15.3
  Top Layer w0.3: Rstable.1@51.308,92.964 54.102,92.964 Dstable.2@58.674,97.536 ; Rstable.1@51.555,92.717 cw(c52.153,92.119) 52.153,92.964 cw(c52.153,93.809) Rstable.1@51.555,93.211 ; Rstable.1@51.768,92.504 cw(c52.877,91.395) 52.877,92.964 cw(c52.877,94.533) Rstable.1@51.768,93.424 ; Dstable.2@58.074,97.536 cw(c56.625,97.536) 57.65,96.512 cw(c58.674,95.487) Dstable.2@58.674,96.936
NetJsma_5: Jsma.5 Lgps.2 Ugps.11 | length 16.6
  Top Layer w0.7: Lgps.2@69.516,56.388 Lgps.2@69.561,56.343
  Top Layer w0.8: Lgps.2@69.286,56.158 cw(c68.731,55.603) 69.516,55.603 cw(c70.301,55.603) Lgps.2@69.746,56.158 ; Lgps.2@69.516,56.388 69.516,54.707 ccw(c71.09,54.707) 69.977,53.594 cw(c69.195,52.812) 70.301,52.812 Jsma.5@70.301,50.292 Ugps.11@70.301,44.481 ; Jsma.5@69.7,50.893 ccw(c68.249,52.344) 70.301,52.344 ccw(c72.353,52.344) Jsma.5@70.902,50.893
NetLgps_1: Lgps.1 RgpsBias.2 | length 5.7
  Top Layer w0.7: Lgps.1@72.216,56.388 RgpsBias.2@75.104,56.388 ; Lgps.1@72.506,56.123 cw(c73.146,55.483) 73.146,56.388 cw(c73.146,57.293) Lgps.1@72.506,56.653 ; RgpsBias.2@74.814,56.123 ccw(c74.174,55.483) 74.174,56.388 ccw(c74.174,57.293) RgpsBias.2@74.814,56.653
NetPgnd_1: Pgnd.1 Pm31.1 | length 32.3
  Top Layer w0.7: Pm31.1@2.126,5.874 ccw(c-2.398,10.398) 4,10.398 ccw(c10.398,10.398) Pm31.1@5.874,5.874 ; Pm31.1@2.621,5.379 ccw(c-0.708,8.708) 4,8.708 ccw(c8.708,8.708) Pm31.1@5.379,5.379 ; Pm31.1@3.116,4.884 ccw(c0.982,7.018) 4,7.018 ccw(c7.018,7.018) Pm31.1@4.884,4.884 ; Pm31.1@4,4 4,10.858 4.318,11.176 Pgnd.1@5.588,11.176 ; Pgnd.1@5.305,10.893 ccw(c4.622,10.21) 4.622,11.176 ccw(c4.622,12.142) Pgnd.1@5.305,11.459
  other v3: 4,1.587 2.349,2.349 5.651,2.349 1.587,4 6.413,4 2.349,5.651 5.651,5.651 4,6.413
NetPublox_1: Publox.1 Ugps.21 | length 9.9
  Top Layer w0.3: Publox.1@74.452,29.004 ccw(c74.317,29.337) 74.676,29.337 ; Publox.1@74.676,28.448 74.676,29.337 ; Publox.1@74.9,29.004 cw(c75.035,29.337) 74.676,29.337 ; Ugps.21@79.724,31.804 cw(c79.297,31.377) 79.901,31.377 cw(c80.505,31.377) Ugps.21@80.078,31.804 ; Ugps.21@79.901,32.481 79.901,31.26 78.256,29.615 74.954,29.615 74.676,29.337
NetPublox_2: Publox.2 Ugps.20 | length 12.2
  Top Layer w0.3: Publox.2@72.136,28.448 73.803,30.115 77.613,30.115 78.801,31.303 Ugps.20@78.801,32.481 ; Publox.2@72.136,29.048 ccw(c72.136,30.497) 73.16,29.472 ccw(c74.185,28.448) Publox.2@72.736,28.448 ; Ugps.20@78.624,31.804 cw(c78.197,31.377) 78.801,31.377 cw(c79.405,31.377) Ugps.20@78.978,31.804
NetRadBin_2: RadBin.2 Uad.7 | length 8.6
  Top Layer w0.3: RadBin.2@10.843,34.463 ccw(c9.734,35.572) 11.303,35.572 ccw(c12.872,35.572) RadBin.2@11.763,34.463 ; RadBin.2@11.056,34.25 ccw(c10.458,34.848) 11.303,34.848 ccw(c12.148,34.848) RadBin.2@11.55,34.25 ; Uad.7@11.162,36.956 cw(c10.82,36.614) 11.303,36.614 cw(c11.786,36.614) Uad.7@11.444,36.956 ; RadBin.2@11.303,34.003 Uad.7@11.303,38.047
NetRadClr_2: RadClr.2 Uad.6 | length 9.3
  Top Layer w0.3: RadClr.2@8.255,34.003 10.033,35.781 Uad.6@10.033,38.047 ; RadClr.2@8.255,34.353 ccw(c8.255,35.198) 8.852,34.6 ccw(c9.45,34.003) RadClr.2@8.605,34.003 ; RadClr.2@8.255,34.653 ccw(c8.255,36.222) 9.365,35.113 ccw(c10.474,34.003) RadClr.2@8.905,34.003 ; Uad.6@9.892,36.956 cw(c9.55,36.614) 10.033,36.614 cw(c10.516,36.614) Uad.6@10.174,36.956
NetRAdjLcd_2: RAdjLcd.2 Ulcd.3 | length 12.9
  Top Layer w0.7: RAdjLcd.2@91.44,63.469 cw(c91.44,62.168) 92.36,63.088 cw(c93.28,64.008) RAdjLcd.2@91.979,64.008 ; RAdjLcd.2@91.44,64.008 97.536,57.912 Ulcd.3@97.536,57.404 ; 96.494,58.954 cw(c94.944,57.404) Ulcd.3@97.136,57.404
NetRadLdac_1: RadLdac.1 Uad.10 | length 24.4
  Top Layer w0.3: RadLdac.1@4.731,33.561 ccw(c3.716,32.618) 3.716,34.003 ; RadLdac.1@4.731,34.445 cw(c3.716,35.388) 3.716,34.003 ; RadLdac.1@4.951,33.765 ccw(c4.404,33.257) 4.404,34.003 ccw(c4.404,34.749) RadLdac.1@4.951,34.241 ; RadLdac.1@5.207,34.003 3.716,34.003 ; Uad.10@11.162,46.206 cw(c10.82,45.864) 11.303,45.864 cw(c11.786,45.864) Uad.10@11.444,46.206 ; Uad.10@11.303,47.297 11.303,45.593 10.795,45.085 10.16,45.085 8.763,43.688 4.953,39.878 3.429,39.878 2.54,38.989 2.54,35.179 3.716,34.003
NetRclcFB_1: RclcFB.1 RclcGnd.2 Uclc.2 | length 14.8
  Top Layer w0.7: 27.878,62.23 cw(c27.878,61.161) 28.634,61.917 cw(c27.857,61.14) 28.956,61.14 ccw(c29.39,61.14) 29.083,60.833 ccw(c30.309,62.059) 30.309,60.325 Uclc.2@31.205,60.325 32.048,60.325 cw(c32.048,58.591) 33.274,59.817 cw(c32.241,58.784) 33.702,58.784 RclcFB.1@33.702,53.086 ; RclcFB.1@33.437,53.351 ccw(c32.797,53.991) 33.702,53.991 ccw(c34.607,53.991) RclcFB.1@33.967,53.351